# Altium PCB WoodStoveLayout1.PcbDoc (part 3 of 4)
Units mil, origin at the board's own origin, x right, y up, seen from the top; angles counter-clockwise.
Board outline 4000 x 3000 mil, 4 copper layers (Top Layer, L2, L3, Bottom Layer), stack 64.6 mil thick; 132 components, 92 nets, 551 pads, 53 vias.
Unrouted connection lines stored in the file: 224.
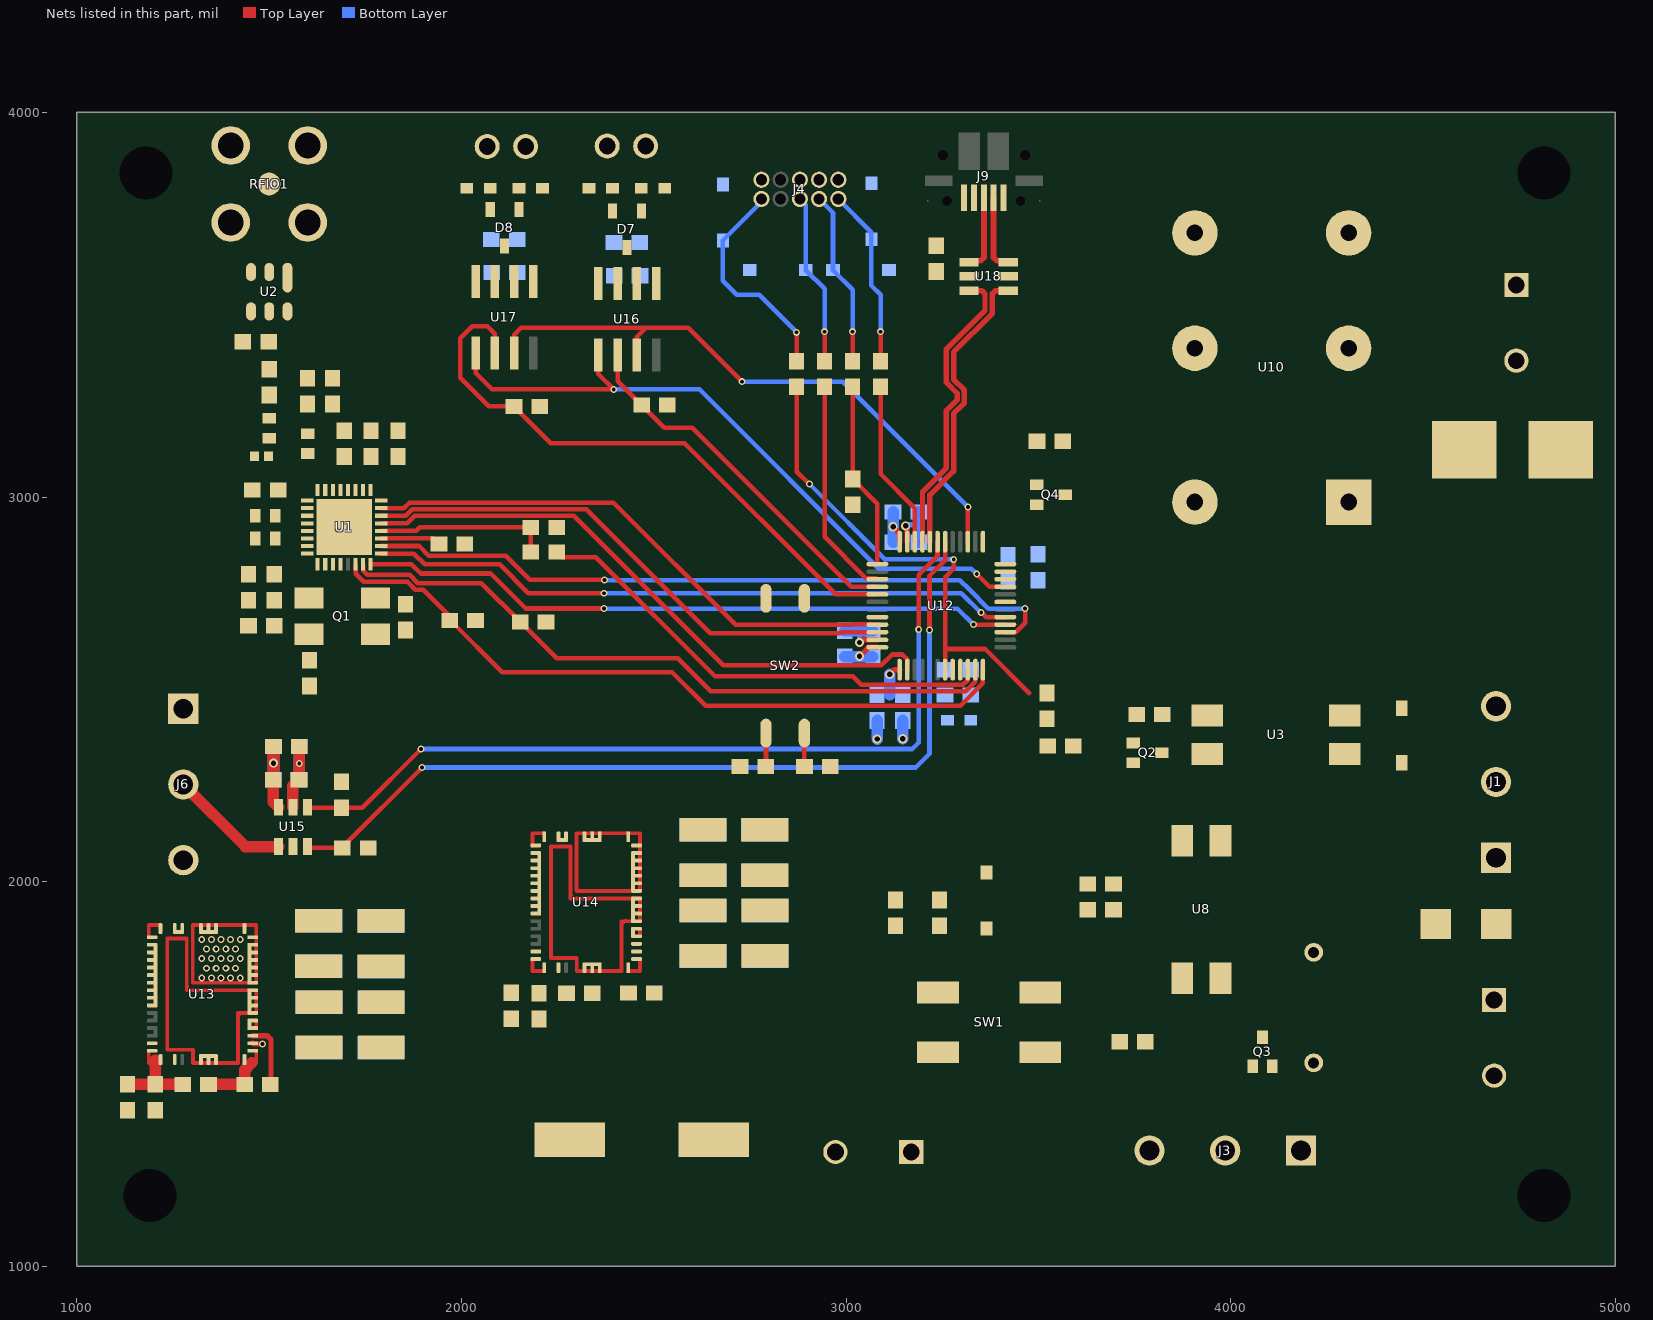
[diagram p4: the nets of this part, all layers, seen from the top]

## Part data (continued)
C25 C26 C35 C36: Capacitance=10uF, Case/Package=1210, Case Code (Metric)=3225, Dielectric=X7R, Manufacturer=Murata, Manufacturer Part Number=GRM32ER71H106KA12L, Max Operating Temperature=125°C, Min Operating Temperature=-55°C, Package Quantity=1000, Supplier Part Number 1=GRM32ER71H106KA12L-ND, Tolerance=10%, Voltage=50V, Case Code (Imperial)=1210, ComponentLink1Description=https://datasheet.ciiva.com/16497/product-16497010.pdf, ComponentLink1URL=https://datasheet.ciiva.com/16497/product-16497010.pdf, ComponentLink2Description=https://datasheet.ciiva.com/6270/partnumbering-e-01-6270167.pdf, ComponentLink2URL=https://datasheet.ciiva.com/6270/partnumbering-e-01-6270167.pdf, ComponentLink3Description=https://datasheet.ciiva.com/6270/partnumbering-e-01-6270168.pdf, ComponentLink3URL=https://datasheet.ciiva.com/6270/partnumbering-e-01-6270168.pdf, ComponentLink4Description=https://datasheet.ciiva.com/6270/partnumbering-e-01-6270169.pdf, ComponentLink4URL=https://datasheet.ciiva.com/6270/partnumbering-e-01-6270169.pdf, ComponentLink5Description=https://datasheet.ciiva.com/11789/0900766b80ef921d-11789081.pdf, ComponentLink5URL=https://datasheet.ciiva.com/11789/0900766b80ef921d-11789081.pdf, ComponentLink6Description=https://datasheet.ciiva.com/3777/4286grm32er71h106ka1223-3777306.pdf, ComponentLink6URL=https://datasheet.ciiva.com/3777/4286grm32er71h106ka1223-3777306.pdf, ComponentLink7Description=https://datasheet.ciiva.com/11607/c02e-11607596.pdf, ComponentLink7URL=https://datasheet.ciiva.com/11607/c02e-11607596.pdf, ComponentLink8Description=https://datasheet.ciiva.com/46441/1754714-46441340.pdf, ComponentLink8URL=https://datasheet.ciiva.com/46441/1754714-46441340.pdf, ComponentLink9Description=https://datasheet.ciiva.com/2989/c02e-2989823.pdf, ComponentLink9URL=https://datasheet.ciiva.com/2989/c02e-2989823.pdf, Depth=2.5mm, Height=2.5mm, Lead Free="Lead Free", Length=3.2mm, Material=Ceramic, Mount="Surface Mount", Packaging="Tape and Reel", Radiation Hardening=No, REACH SVHC="No SVHC", Stock 1=0, Supplier 1=Digi-Key, Termination=SMD/SMT, Thickness=0.106inch, Voltage Rating=50V, Voltage Rating (DC)=50V, Width=2.5mm
C27 C28 C37 C38: Capacitance=4.7uF, Case/Package=1210, Case Code (Metric)=3225, Dielectric=X7R, Manufacturer=Murata, Manufacturer Part Number=GRM32ER71H475KA88L, Max Operating Temperature=125°C, Min Operating Temperature=-55°C, Package Quantity=1, Tolerance=10%, Voltage=50V, Case Code (Imperial)=1210, ComponentLink1Description=https://datasheet.ciiva.com/7937/1747494-7937780.pdf, ComponentLink1URL=https://datasheet.ciiva.com/7937/1747494-7937780.pdf, ComponentLink2Description=https://datasheet.ciiva.com/11786/0900766b806042af-11786805.pdf, ComponentLink2URL=https://datasheet.ciiva.com/11786/0900766b806042af-11786805.pdf, ComponentLink3Description=https://datasheet.ciiva.com/22703/1747494-22703399.pdf, ComponentLink3URL=https://datasheet.ciiva.com/22703/1747494-22703399.pdf, ComponentLink4Description=https://datasheet.ciiva.com/48436/grm32er71h475ka88l-eng-tds-48436715.pdf, ComponentLink4URL=https://datasheet.ciiva.com/48436/grm32er71h475ka88l-eng-tds-48436715.pdf, ComponentLink5Description=https://datasheet.ciiva.com/18101/getdatasheetpartid-55823-18101548.pdf, ComponentLink5URL=https://datasheet.ciiva.com/18101/getdatasheetpartid-55823-18101548.pdf, ComponentLink6Description=https://datasheet.ciiva.com/142/partnumbering-e-01-142157.pdf, ComponentLink6URL=https://datasheet.ciiva.com/142/partnumbering-e-01-142157.pdf, ComponentLink7Description=https://datasheet.ciiva.com/142/partnumbering-e-01-142158.pdf, ComponentLink7URL=https://datasheet.ciiva.com/142/partnumbering-e-01-142158.pdf, ComponentLink8Description=https://datasheet.ciiva.com/142/partnumbering-e-01-142159.pdf, ComponentLink8URL=https://datasheet.ciiva.com/142/partnumbering-e-01-142159.pdf, ComponentLink9Description=https://datasheet.ciiva.com/16199/product-16199503.pdf, ComponentLink9URL=https://datasheet.ciiva.com/16199/product-16199503.pdf, Depth=2.5mm, Height=2.5mm, Lead Free="Lead Free", Length=3.2mm, Mount="Surface Mount", Number of Pins=2, Packaging="Tape and Reel", Radiation Hardening=No, REACH SVHC="No SVHC", Stock 1=0, Supplier 1="Future Electronics", Supplier Part Number 1=GRM32ER71H475KA88L, Termination=SMD/SMT, Thickness=0.106inch, Voltage Rating=50V, Voltage Rating (DC)=50V, Width=0.098inch
C29: Capacitance=100pF, Case/Package=0603, Case Code (Metric)=1608, Dielectric=C0G, Dielectric Material=Ceramic, Insulation Resistance=10GR, Manufacturer=Murata, Manufacturer Part Number=GRM1885C1H101JA01D, Max Operating Temperature=125°C, Min Operating Temperature=-55°C, Package Quantity=1, Supplier Part Number 1=490-1427-2-ND, Temperature Coefficient=30ppm/°C, Tolerance=5%, Voltage=50V, Case Code (Imperial)=0603, ComponentLink1Description=https://datasheet.ciiva.com/131/product-131088.pdf, ComponentLink1URL=https://datasheet.ciiva.com/131/product-131088.pdf, ComponentLink2Description=https://datasheet.ciiva.com/3777/grm1885c1h101ja0123-3777264.pdf, ComponentLink2URL=https://datasheet.ciiva.com/3777/grm1885c1h101ja0123-3777264.pdf, ComponentLink3Description=https://datasheet.ciiva.com/131/partnumbering-e-01-131089.pdf, ComponentLink3URL=https://datasheet.ciiva.com/131/partnumbering-e-01-131089.pdf, ComponentLink4Description=https://datasheet.ciiva.com/18100/getdatasheetpartid-26823-18100641.pdf, ComponentLink4URL=https://datasheet.ciiva.com/18100/getdatasheetpartid-26823-18100641.pdf, ComponentLink5Description=https://datasheet.ciiva.com/11605/c02e-11605557.pdf, ComponentLink5URL=https://datasheet.ciiva.com/11605/c02e-11605557.pdf, ComponentLink6Description=https://datasheet.ciiva.com/28556/4360-28556551.pdf, ComponentLink6URL=https://datasheet.ciiva.com/28556/4360-28556551.pdf, ComponentLink7Description=https://datasheet.ciiva.com/7828/4360-7828889.pdf, ComponentLink7URL=https://datasheet.ciiva.com/7828/4360-7828889.pdf, ComponentLink8Description=https://datasheet.ciiva.com/7828/4360-7828890.pdf, ComponentLink8URL=https://datasheet.ciiva.com/7828/4360-7828890.pdf, ComponentLink9Description=https://datasheet.ciiva.com/7828/4360-7828891.pdf, ComponentLink9URL=https://datasheet.ciiva.com/7828/4360-7828891.pdf, ComponentLink10Description=https://datasheet.ciiva.com/14116/grmseries-tc-hitype-eng-14116828.pdf, ComponentLink10URL=https://datasheet.ciiva.com/14116/grmseries-tc-hitype-eng-14116828.pdf, ComponentLink11Description=https://datasheet.ciiva.com/16291/product-16291613.pdf, ComponentLink11URL=https://datasheet.ciiva.com/16291/product-16291613.pdf, ComponentLink12Description=https://datasheet.ciiva.com/131/partnumbering-e-01-131087.pdf, ComponentLink12URL=https://datasheet.ciiva.com/131/partnumbering-e-01-131087.pdf, ComponentLink13Description=https://datasheet.ciiva.com/14116/grmseries-tc-hitype-eng-14116815.pdf, ComponentLink13URL=https://datasheet.ciiva.com/14116/grmseries-tc-hitype-eng-14116815.pdf, ComponentLink14Description=https://datasheet.ciiva.com/29149/450134-da-01-en-vs-kondensator-0603-29149008.pdf, ComponentLink14URL=https://datasheet.ciiva.com/29149/450134-da-01-en-vs-kondensator-0603-29149008.pdf, Depth=0.8mm, Height=0.8mm, Lead Free="Lead Free", Length=1.6mm, Material=Ceramic, Mount="Surface Mount", Number of Pins=2, Packaging="Tape and Reel", Pricing 1="4000=0.01524 (USD)", Radiation Hardening=No, REACH SVHC=Unknown, Stock 1=0, Supplier 1=Digi-Key, Termination=SMD/SMT, Thickness=0.035inch, Voltage Rating=50V, Voltage Rating (DC)=50V, Weight=7.1E-05oz, Width=0.031inch
C30 C31 C32 C33 C40 C41 C42: Capacitance=22uF, Case/Package=1210, Case Code (Metric)=3225, Dielectric=X7R, Manufacturer=Murata, Manufacturer Part Number=GRM32ER71E226KE15L, Max Operating Temperature=125°C, Min Operating Temperature=-55°C, Package Quantity=1, Supplier Part Number 1=490-5313-2-ND, Tolerance=10%, Voltage=25V, Case Code (Imperial)=1210, ComponentLink1Description=https://datasheet.ciiva.com/6072/1697714-6072768.pdf, ComponentLink1URL=https://datasheet.ciiva.com/6072/1697714-6072768.pdf, ComponentLink2Description=https://datasheet.ciiva.com/16497/product-16497009.pdf, ComponentLink2URL=https://datasheet.ciiva.com/16497/product-16497009.pdf, ComponentLink3Description=https://datasheet.ciiva.com/175/partnumbering-e-01-175746.pdf, ComponentLink3URL=https://datasheet.ciiva.com/175/partnumbering-e-01-175746.pdf, ComponentLink4Description=https://datasheet.ciiva.com/175/partnumbering-e-01-175747.pdf, ComponentLink4URL=https://datasheet.ciiva.com/175/partnumbering-e-01-175747.pdf, ComponentLink5Description=https://datasheet.ciiva.com/175/partnumbering-e-01-175748.pdf, ComponentLink5URL=https://datasheet.ciiva.com/175/partnumbering-e-01-175748.pdf, ComponentLink6Description=https://datasheet.ciiva.com/3776/2741grm32er71e226ke1523-3776996.pdf, ComponentLink6URL=https://datasheet.ciiva.com/3776/2741grm32er71e226ke1523-3776996.pdf, ComponentLink7Description=https://datasheet.ciiva.com/22703/1697714-22703397.pdf, ComponentLink7URL=https://datasheet.ciiva.com/22703/1697714-22703397.pdf, ComponentLink8Description=https://datasheet.ciiva.com/11789/0900766b80ef921d-11789129.pdf, ComponentLink8URL=https://datasheet.ciiva.com/11789/0900766b80ef921d-11789129.pdf, ComponentLink9Description=https://datasheet.ciiva.com/29201/451826-da-01-de-vs-kondens-grm32-er71e-226ke15l-29201795.pdf, ComponentLink9URL=https://datasheet.ciiva.com/29201/451826-da-01-de-vs-kondens-grm32-er71e-226ke15l-29201795.pdf, Depth=2.5mm, Height=2.5mm, Lead Free="Lead Free", Length=3.2mm, Material=Ceramic, Mount="Surface Mount", Number of Pins=2, Packaging="Tape and Reel", Pricing 1="1000=0.29 (USD)", Radiation Hardening=No, REACH SVHC="No SVHC", Stock 1=0, Supplier 1=Digi-Key, Termination=SMD/SMT, Thickness=0.106inch, Voltage Rating=25V, Voltage Rating (DC)=25V, Width=0.098inch
C34: Capacitance=100uF, Case/Package=Radial, ESR (Equivalent Series Resistance)=28mR, Leakage Current=50uA, Manufacturer=Panasonic, Manufacturer Part Number=EEH-ZA1H101P, Max Operating Temperature=105°C, Min Operating Temperature=-55°C, Package Quantity=500, Ripple Current=2A, Supplier Part Number 1=P15442TR-ND, Tolerance=20%, Voltage=50V, ComponentLink1Description=https://datasheet.ciiva.com/48541/eehza-eng-tds-48541031.pdf, ComponentLink1URL=https://datasheet.ciiva.com/48541/eehza-eng-tds-48541031.pdf, ComponentLink2Description=https://datasheet.ciiva.com/18524/aba0000ce136-18524922.pdf, ComponentLink2URL=https://datasheet.ciiva.com/18524/aba0000ce136-18524922.pdf, ComponentLink3Description=https://datasheet.ciiva.com/6134/1536543-6134363.pdf, ComponentLink3URL=https://datasheet.ciiva.com/6134/1536543-6134363.pdf, ComponentLink4Description=https://datasheet.ciiva.com/7794/1536543-7794235.pdf, ComponentLink4URL=https://datasheet.ciiva.com/7794/1536543-7794235.pdf, ComponentLink5Description=https://datasheet.ciiva.com/18524/aba0000ce136-18524923.pdf, ComponentLink5URL=https://datasheet.ciiva.com/18524/aba0000ce136-18524923.pdf, ComponentLink6Description=https://datasheet.ciiva.com/30178/86aba0000ce136-30178699.pdf, ComponentLink6URL=https://datasheet.ciiva.com/30178/86aba0000ce136-30178699.pdf, ComponentLink7Description=https://datasheet.ciiva.com/14595/70256916-14595260.pdf, ComponentLink7URL=https://datasheet.ciiva.com/14595/70256916-14595260.pdf, ComponentLink8Description=https://datasheet.ciiva.com/18524/aba0000ce136-18524924.pdf, ComponentLink8URL=https://datasheet.ciiva.com/18524/aba0000ce136-18524924.pdf, ComponentLink9Description=https://datasheet.ciiva.com/28691/1536543-28691421.pdf, ComponentLink9URL=https://datasheet.ciiva.com/28691/1536543-28691421.pdf, ComponentLink10Description=https://datasheet.ciiva.com/22730/1536543-22730558.pdf, ComponentLink10URL=https://datasheet.ciiva.com/22730/1536543-22730558.pdf, ComponentLink11Description=https://datasheet.ciiva.com/10327/aba0000ce136-10327231.pdf, ComponentLink11URL=https://datasheet.ciiva.com/10327/aba0000ce136-10327231.pdf, Diameter=10mm, Height=10.2mm, Height - Seated (Max)=0.413inch, Lead Diameter=0.9mm, Lead Free="Lead Free", Lead Pitch=4.6mm, Length=10.2mm, Life (Hours)=10000Hour, Material=Polymer, Mount="Surface Mount,PCB", Packaging="Tape and Reel", Polarity=Polar, Pricing 1="500=1.20086, 1000=1.05076, 2500=1.01323, 5000=0.9757 (USD)", Radiation Hardening=No, REACH SVHC="No SVHC", Ripple Current (AC)=2A, Stock 1=21500, Supplier 1=Digi-Key, Termination=SMD/SMT, Voltage Rating=50V, Voltage Rating (DC)=50V
C39: Capacitance=150pF, Case/Package=0603, Case Code (Metric)=1608, Dielectric=C0G, Dielectric Material=Ceramic, Insulation Resistance=10GR, Manufacturer=Murata, Manufacturer Part Number=GRM1885C1H151JA01D, Max Operating Temperature=125°C, Min Operating Temperature=-55°C, Package Quantity=1, Supplier Part Number 1=490-1431-2-ND, Temperature Coefficient=30ppm/°C, Tolerance=5%, Voltage=50V, Case Code (Imperial)=0603, ComponentLink1Description=https://datasheet.ciiva.com/18100/getdatasheetpartid-31970-18100850.pdf, ComponentLink1URL=https://datasheet.ciiva.com/18100/getdatasheetpartid-31970-18100850.pdf, ComponentLink2Description=https://datasheet.ciiva.com/7828/4360-7828901.pdf, ComponentLink2URL=https://datasheet.ciiva.com/7828/4360-7828901.pdf, ComponentLink3Description=https://datasheet.ciiva.com/7828/4360-7828902.pdf, ComponentLink3URL=https://datasheet.ciiva.com/7828/4360-7828902.pdf, ComponentLink4Description=https://datasheet.ciiva.com/131/partnumbering-e-01-131975.pdf, ComponentLink4URL=https://datasheet.ciiva.com/131/partnumbering-e-01-131975.pdf, ComponentLink5Description=https://datasheet.ciiva.com/131/partnumbering-e-01-131976.pdf, ComponentLink5URL=https://datasheet.ciiva.com/131/partnumbering-e-01-131976.pdf, ComponentLink6Description=https://datasheet.ciiva.com/131/partnumbering-e-01-131977.pdf, ComponentLink6URL=https://datasheet.ciiva.com/131/partnumbering-e-01-131977.pdf, ComponentLink7Description=https://datasheet.ciiva.com/16214/product-16214654.pdf, ComponentLink7URL=https://datasheet.ciiva.com/16214/product-16214654.pdf, ComponentLink8Description=https://datasheet.ciiva.com/11787/0900766b808736db-11787103.pdf, ComponentLink8URL=https://datasheet.ciiva.com/11787/0900766b808736db-11787103.pdf, ComponentLink9Description=https://datasheet.ciiva.com/29241/450401-da-01-en-vs-kondensator-0603-29241818.pdf, ComponentLink9URL=https://datasheet.ciiva.com/29241/450401-da-01-en-vs-kondensator-0603-29241818.pdf, Depth=0.8mm, Height=0.8mm, Lead Free="Lead Free", Length=1.6mm, Material=Ceramic, Mount="Surface Mount", Number of Pins=2, Packaging="Tape and Reel", Pricing 1="4000=0.01668 (USD)", Radiation Hardening=No, REACH SVHC="No SVHC", Stock 1=0, Supplier 1=Digi-Key, Termination=SMD/SMT, Thickness=0.035inch, Voltage Rating=50V, Voltage Rating (DC)=50V, Width=0.8mm
C43: Capacitance=47uF, Case/Package=1210, Case Code (Metric)=3225, Dielectric=X5R, Manufacturer=Murata, Manufacturer Part Number=GRM32ER61C476KE15L, Max Operating Temperature=85°C, Min Operating Temperature=-55°C, Package Quantity=1, Supplier Part Number 1=GRM32ER61C476KE15L-ND, Tolerance=10%, Voltage=16V, Case Code (Imperial)=1210, ComponentLink1Description=https://datasheet.ciiva.com/5411/product-5411296.pdf, ComponentLink1URL=https://datasheet.ciiva.com/5411/product-5411296.pdf, ComponentLink2Description=https://datasheet.ciiva.com/6264/c02e-6264496.pdf, ComponentLink2URL=https://datasheet.ciiva.com/6264/c02e-6264496.pdf, ComponentLink3Description=https://datasheet.ciiva.com/16497/product-16497029.pdf, ComponentLink3URL=https://datasheet.ciiva.com/16497/product-16497029.pdf, ComponentLink4Description=https://datasheet.ciiva.com/16625/product-16625285.pdf, ComponentLink4URL=https://datasheet.ciiva.com/16625/product-16625285.pdf, ComponentLink5Description=https://datasheet.ciiva.com/6173/1747491-6173112.pdf, ComponentLink5URL=https://datasheet.ciiva.com/6173/1747491-6173112.pdf, ComponentLink6Description=https://datasheet.ciiva.com/6264/partnumbering-e-01-6264495.pdf, ComponentLink6URL=https://datasheet.ciiva.com/6264/partnumbering-e-01-6264495.pdf, ComponentLink7Description=https://datasheet.ciiva.com/29202/451184-da-01-de-vs-chip-kond-1210-47-0-uf-10pr-16-0v-x5r-29202483.pdf, ComponentLink7URL=https://datasheet.ciiva.com/29202/451184-da-01-de-vs-chip-kond-1210-47-0-uf-10pr-16-0v-x5r-29202483.pdf, ComponentLink8Description=https://datasheet.ciiva.com/29201/451871-da-01-de-vs-kondens-grm32-er61c-476ke15l-29201820.pdf, ComponentLink8URL=https://datasheet.ciiva.com/29201/451871-da-01-de-vs-kondens-grm32-er61c-476ke15l-29201820.pdf, Depth=2.5mm, Height=2.5mm, Lead Free="Lead Free", Length=3.2mm, Material=Ceramic, Mount="Surface Mount", Number of Pins=2, Packaging="Cut Tape", Radiation Hardening=No, REACH SVHC="No SVHC", Stock 1=0, Supplier 1=Digi-Key, Termination=SMD/SMT, Thickness=0.106inch, Voltage Rating=16V, Voltage Rating (DC)=16V, Width=0.098inch
D1: "LED; SMD; 0603; red; 18-54mcd; 1.6x0.8x0.55mm; 130°; 2÷2.4V; 20mA", Package="0603 Lite-On", Availability=Good, MF=Lite-On, MP=LTST-C191KRKT, Price="0.06 USD", SnapEDA_Link=https://www.snapeda.com/parts/LTST-C191KRKT/Lite-On/view-part/?ref=snap
D2 D3 D4 D5 D6: "DIODE Zener 5.1V 500mw", Breakdown Voltage=5.36V, Case/Package=SOD-123-2, Forward Voltage=900mV, Manufacturer="ON Semiconductor", Max Operating Temperature=150°C, Max Power Dissipation=500mW, Max Reverse Leakage Current=2uA, Min Operating Temperature=-55°C, Package Quantity=1, Test Current=5mA, Tolerance=5%, Voltage Rating (DC)=5.1V, Zener Current=10mA, ComponentLink1Description=https://datasheet.ciiva.com/895/mmsz2v4t1-d-895025.pdf, ComponentLink1URL=https://datasheet.ciiva.com/895/mmsz2v4t1-d-895025.pdf, ComponentLink2Description=https://datasheet.ciiva.com/895/mmsz2v4t1-d-895026.pdf, ComponentLink2URL=https://datasheet.ciiva.com/895/mmsz2v4t1-d-895026.pdf, ComponentLink3Description=https://datasheet.ciiva.com/895/mmsz2v4t1-d-895027.pdf, ComponentLink3URL=https://datasheet.ciiva.com/895/mmsz2v4t1-d-895027.pdf, ComponentLink4Description=https://datasheet.ciiva.com/15142/getdatasheetpartid-72078-15142387.pdf, ComponentLink4URL=https://datasheet.ciiva.com/15142/getdatasheetpartid-72078-15142387.pdf, ComponentLink5Description=https://datasheet.ciiva.com/8346/mmsz2v4t1-d-8346086.pdf, ComponentLink5URL=https://datasheet.ciiva.com/8346/mmsz2v4t1-d-8346086.pdf, ComponentLink6Description=https://datasheet.ciiva.com/8026/78656-8026888.pdf, ComponentLink6URL=https://datasheet.ciiva.com/8026/78656-8026888.pdf, ComponentLink7Description=https://datasheet.ciiva.com/26092/mmsz2v4t1-d-26092696.pdf, ComponentLink7URL=https://datasheet.ciiva.com/26092/mmsz2v4t1-d-26092696.pdf, ComponentLink8Description=https://datasheet.ciiva.com/16542/mmsz2v4t1-d-16542073.pdf, ComponentLink8URL=https://datasheet.ciiva.com/16542/mmsz2v4t1-d-16542073.pdf, ComponentLink9Description=https://datasheet.ciiva.com/8026/78656-8026890.pdf, ComponentLink9URL=https://datasheet.ciiva.com/8026/78656-8026890.pdf, Element Configuration=Single, Height=1.12mm, Impedance=60R, Lead Free="Lead Free", Length=2.69mm, Manufacturer Part Number=MMSZ5V1T1G, Material=Plastic, Number of Pins=2, Packaging="Tape and Reel", Peak Reverse Current=2uA, Power Dissipation=500mW, Power Rating=500mW, Radiation Hardening=No, REACH SVHC="No SVHC", Stock 1=0, Supplier 1="Future Electronics", Supplier Part Number 1=MMSZ5V1T1G, Voltage Tolerance=5%, Width=1.6mm, Working Voltage=5.1V, Zener Voltage=5.1V
D?: "Schottky Power Rectifier, 2-Pin SMA, Pb-Free, Tape and Reel", Manufacturer="On Semiconductor", Supplier Part Number 1=SS16T3GOSTR-ND, ComponentLink1Description="Manufacturer URL", ComponentLink1URL=http://www.onsemi.com/, ComponentLink2Description=Datasheet, ComponentLink2URL=http://www.onsemi.cn/pub_link/Collateral/SS16-D.PDF, ComponentLink3Description="Package Specification", ComponentLink3URL=http://www.onsemi.com/pub_link/Collateral/403D-02.PDF, Configuration=Single, DatasheetVersion="Rev. 7", IFSM Max (A)=40, Mounting Technology="Surface Mount", PackageDescription="2-Pin Small Molded Package, J-Bend Lead, Body 2.605 x 4.315 mm", PackageReference=SMA-2-403D-02, PackageVersion="Rev. G, 07/2012", Packing="Tape and Reel", PartNumber=SS16T3G, RoHS=TRUE, Supplier 1=Digi-Key, Supplier 2=Digi-Key, Supplier 3=Digi-Key, Supplier 4=Farnell, Supplier 5=Farnell, Supplier 6=Newark, Supplier 7=Newark, Supplier 8=Mouser, Supplier Part Number 2=SS16T3GOSCT-ND, Supplier Part Number 3=SS16T3GOSDKR-ND, Supplier Part Number 4=2317421, Supplier Part Number 5=1900107, Supplier Part Number 6=98H0976, Supplier Part Number 7=10N9613, Supplier Part Number 8=863-SS16T3G
FB1: Case/Package=0603, Case Code (Metric)=1608, Current Rating=500mA, DC Resistance (DCR)=380mR, Frequency=100MHz, Manufacturer=Murata, Manufacturer Part Number=BLM18AG601SN1D, Max Operating Temperature=125°C, Min Operating Temperature=-55°C, Package Quantity=1, Supplier Part Number 1=490-1014-2-ND, Tolerance=25%, Case Code (Imperial)=0603, ComponentLink1Description=https://datasheet.ciiva.com/1012/l0110s0100blm18a-1012017.pdf, ComponentLink1URL=https://datasheet.ciiva.com/1012/l0110s0100blm18a-1012017.pdf, ComponentLink2Description=https://datasheet.ciiva.com/1012/l0110s0100blm18a-1012018.pdf, ComponentLink2URL=https://datasheet.ciiva.com/1012/l0110s0100blm18a-1012018.pdf, ComponentLink3Description=https://datasheet.ciiva.com/1012/l0110s0100blm18a-1012019.pdf, ComponentLink3URL=https://datasheet.ciiva.com/1012/l0110s0100blm18a-1012019.pdf, ComponentLink4Description=https://datasheet.ciiva.com/1466/1756147-1466933.pdf, ComponentLink4URL=https://datasheet.ciiva.com/1466/1756147-1466933.pdf, ComponentLink5Description=https://datasheet.ciiva.com/19460/1844766-19460213.pdf, ComponentLink5URL=https://datasheet.ciiva.com/19460/1844766-19460213.pdf, ComponentLink6Description=https://datasheet.ciiva.com/1466/1756147-1466934.pdf, ComponentLink6URL=https://datasheet.ciiva.com/1466/1756147-1466934.pdf, ComponentLink7Description=https://datasheet.ciiva.com/16210/l0110s0100blm18a-16210006.pdf, ComponentLink7URL=https://datasheet.ciiva.com/16210/l0110s0100blm18a-16210006.pdf, ComponentLink8Description=https://datasheet.ciiva.com/3081/l0110s0100blm18a-3081613.pdf, ComponentLink8URL=https://datasheet.ciiva.com/3081/l0110s0100blm18a-3081613.pdf, ComponentLink9Description=https://datasheet.ciiva.com/29347/442309-da-01-en-chip-drossel-0603-600r-500ma-1-6x0-8mm-29347900.pdf, ComponentLink9URL=https://datasheet.ciiva.com/29347/442309-da-01-en-chip-drossel-0603-600r-500ma-1-6x0-8mm-29347900.pdf, ComponentLink10Description=https://datasheet.ciiva.com/41449/001172228-da-01-en-drossel-0603-600r-1-6x0-8mm-4000st-41449517.pdf, ComponentLink10URL=https://datasheet.ciiva.com/41449/001172228-da-01-en-drossel-0603-600r-1-6x0-8mm-4000st-41449517.pdf, Core Material=Ferrite, DC Current=500mA, Depth=0.8mm, Height=0.8mm, Impedance=600R, Lead Free="Lead Free", Length=1.6mm, Material=Steel,Ferrite, Max Current Rating=500mA, Max DC Current=500mA, Military Standard=Not, Number of Circuits=1, Number of Lines=1, Number of Pins=2, Packaging="Tape and Reel", Pricing 1="4000=0.02096, 8000=0.019, 12000=0.01834, 28000=0.01703, 100000=0.01683 (USD)", Radiation Hardening=No, REACH SVHC="No SVHC", Shielding=Unshielded, Stock 1=432000, Supplier 1=Digi-Key, Termination=SMD/SMT, Test Frequency=100MHz, Weight=7.1E-05oz, Width=0.8mm
FB2 FB3 FB4 FB5: Case/Package=0603, Case Code (Metric)=1608, Current Rating=1A, DC Resistance (DCR)=200mR, Manufacturer=Murata, Manufacturer Part Number=BLM18PG471SN1D, Max Operating Temperature=125°C, Min Operating Temperature=-55°C, Package Quantity=1, Supplier Part Number 1=490-5223-2-ND, Test Frequency=100MHz, Tolerance=25%, Case Code (Imperial)=0603, ComponentLink1Description=https://datasheet.ciiva.com/11800/0900766b81275ca5-11800885.pdf, ComponentLink1URL=https://datasheet.ciiva.com/11800/0900766b81275ca5-11800885.pdf, ComponentLink2Description=https://datasheet.ciiva.com/16331/l0110s0100blm18p-16331542.pdf, ComponentLink2URL=https://datasheet.ciiva.com/16331/l0110s0100blm18p-16331542.pdf, ComponentLink3Description=https://datasheet.ciiva.com/8021/1740433-8021497.pdf, ComponentLink3URL=https://datasheet.ciiva.com/8021/1740433-8021497.pdf, ComponentLink4Description=https://datasheet.ciiva.com/6212/l0110s0100blm18p-6212506.pdf, ComponentLink4URL=https://datasheet.ciiva.com/6212/l0110s0100blm18p-6212506.pdf, ComponentLink5Description=https://datasheet.ciiva.com/8021/1740433-8021498.pdf, ComponentLink5URL=https://datasheet.ciiva.com/8021/1740433-8021498.pdf, ComponentLink6Description=https://datasheet.ciiva.com/6212/l0110s0100blm18p-6212508.pdf, ComponentLink6URL=https://datasheet.ciiva.com/6212/l0110s0100blm18p-6212508.pdf, ComponentLink7Description=https://datasheet.ciiva.com/14122/blm-series-eng-tds-14122876.pdf, ComponentLink7URL=https://datasheet.ciiva.com/14122/blm-series-eng-tds-14122876.pdf, ComponentLink8Description=https://datasheet.ciiva.com/6212/l0110s0100blm18p-6212509.pdf, ComponentLink8URL=https://datasheet.ciiva.com/6212/l0110s0100blm18p-6212509.pdf, ComponentLink9Description=https://datasheet.ciiva.com/8508/l0110s0100blm18p-8508303.pdf, ComponentLink9URL=https://datasheet.ciiva.com/8508/l0110s0100blm18p-8508303.pdf, Core Material=Ferrite, DC Current=1A, Depth=0.8mm, Height=0.8mm, Impedance=470R, Lead Free="Lead Free", Length=1.6mm, Material=Steel,Ferrite, Max Current Rating=1A, Max DC Current=1A, Military Standard=Not, Number of Circuits=1, Number of Lines=1, Number of Pins=2, Packaging="Tape and Reel", Pricing 1="4000=0.02208, 8000=0.02001, 12000=0.01932, 28000=0.01794, 100000=0.01773 (USD)", Radiation Hardening=No, REACH SVHC="No SVHC", Resistance=200mR, Stock 1=328000, Supplier 1=Digi-Key, Termination=SMD/SMT, Width=0.8mm
J1 J3 J6: "3 Position terminal block"
J2 J5 J10: "Female Header, Pitch 5 mm, 1 x 2 Position, Height 10 mm, Tail Length 3.5 mm, Rohs, Bulk", Color=Green, Current=13.5A, Standard Package=300, Supplier Part Number 1=23C9697, Voltage=300V, 3D Model=282836-2.pdf, Category="Connectors, Interconnects", Clamp Material - Plating="Brass - Nickel Plated", ComponentLink1Description="Manufacturer URL", ComponentLink1URL=http://www.te.com, ComponentLink2Description=Datasheet, ComponentLink2URL=http://www.te.com.cn/commerce/DocumentDelivery/DDEController?Action=showdoc&DocId=Catalog+Section%7F1308389_EUROSTYLE_TERMINAL_BLOCKS%7F0607%7Fpdf%7FEnglish%7FENG_CS_1308389_EUROSTYLE_TERMINAL_BLOCKS_0607.pdf%7F282836-2, Contact Material - Plating="Brass - Tin Plated", Dynamic Catalog="Buchanan Series", Family="Terminal Blocks - Wire to Board", Featured Product="Eurostyle Terminal Block Connectors", Features="Interlocking (Side)", Housing Material="Polyamide (PA66), Nylon 6/6", Mating Orientation="Horizontal with Board", Mounting Type="Through Hole", Number of Levels=1, Other Names="5ULV-02B / A98076", PackageDescription="Female Header, Pitch 5 mm, 1 x 2 Position, Height 10 mm, Tail Length 3.5 mm", PackageReference=THD, Packaging=Bulk, Pitch="0.197\" (5.00mm)", Positions Per Level=2, Product Training Modules="Wire-to-Board Eurostyle Terminal Blocks", RoHS Information="282836-2 Statement of Compliance", Screw Material - Plating="Brass - Nickel Plated", Screw Thread=M3, Series=Buchanan, Supplier 1=Newark, Supplier 2=Farnell, Supplier 3=Digi-Key, Supplier Part Number 2=3089034, Supplier Part Number 3=A98076-ND, Torque - Screw="0.68 Nm (6 Lb-In)", Wire Gauge="16-30 AWG", Wire Termination="Screw - Rising Cage Clamp"
J4: Housing Colour=Black, Manufacturer=Samtec, Manufacturer Part Number=SHF-105-01-L-D-TH, Max Operating Temperature=125°C, Min Operating Temperature=-55°C, Supplier Part Number 1=SHF-105-01-L-D-TH-ND, ComponentLink1Description=https://datasheet.ciiva.com/9475/eshf-9475367.pdf, ComponentLink1URL=https://datasheet.ciiva.com/9475/eshf-9475367.pdf, ComponentLink2Description=https://datasheet.ciiva.com/22665/shf-22665879.pdf, ComponentLink2URL=https://datasheet.ciiva.com/22665/shf-22665879.pdf, ComponentLink3Description=https://datasheet.ciiva.com/6091/shf-6091993.pdf, ComponentLink3URL=https://datasheet.ciiva.com/6091/shf-6091993.pdf, ComponentLink4Description=https://datasheet.ciiva.com/16710/eshf-16710363.pdf, ComponentLink4URL=https://datasheet.ciiva.com/16710/eshf-16710363.pdf, ComponentLink5Description=https://datasheet.ciiva.com/23730/shf-1xx-01-x-d-xx-xx-mkt-23730878.pdf, ComponentLink5URL=https://datasheet.ciiva.com/23730/shf-1xx-01-x-d-xx-xx-mkt-23730878.pdf, Contact Material=Bronze, Contact Plating=Nickel,Gold, Depth=5.59mm, Gender=Male, Housing Material=Polymer, Length=12.7mm, Number of Contacts=10, Number of Rows=2, Orientation=Straight, Packaging=Bulk, Pitch=1.27mm, Radiation Hardening=No, REACH SVHC="No SVHC", Stock 1=0, Supplier 1=Digi-Key, Termination=Solder
J7 J8: "2.54mm Terminal Connector"
J9: library part 10103594-0001LF
L1: Case/Package=0402, Case Code (Metric)=1005, Current Rating=120mA, DC Resistance (DCR)=2.52R, Inductance=100nh, Inductance Tolerance=5%, Manufacturer=Murata, Manufacturer Part Number=LQW15ANR10J00D, Max Operating Temperature=125°C, Min Operating Temperature=-55°C, Package Quantity=10000, Self Resonant Frequency=1.5GHz, Supplier Part Number 1=490-4090-2-ND, Test Frequency=100MHz, Case Code (Imperial)=0402, ComponentLink1Description=https://datasheet.ciiva.com/18088/getdatasheetpartid-55782-18088805.pdf, ComponentLink1URL=https://datasheet.ciiva.com/18088/getdatasheetpartid-55782-18088805.pdf, ComponentLink2Description=https://datasheet.ciiva.com/17247/l0075s0080lqw15a-00-17247734.pdf, ComponentLink2URL=https://datasheet.ciiva.com/17247/l0075s0080lqw15a-00-17247734.pdf, ComponentLink3Description=https://datasheet.ciiva.com/16293/l0075s0080lqw15a-00-16293049.pdf, ComponentLink3URL=https://datasheet.ciiva.com/16293/l0075s0080lqw15a-00-16293049.pdf, ComponentLink4Description=https://datasheet.ciiva.com/4977/product-4977354.pdf, ComponentLink4URL=https://datasheet.ciiva.com/4977/product-4977354.pdf, ComponentLink5Description=https://datasheet.ciiva.com/1042/l0075s0080lqw15a-00-1042204.pdf, ComponentLink5URL=https://datasheet.ciiva.com/1042/l0075s0080lqw15a-00-1042204.pdf, ComponentLink6Description=https://datasheet.ciiva.com/1042/l0075s0080lqw15a-00-1042205.pdf, ComponentLink6URL=https://datasheet.ciiva.com/1042/l0075s0080lqw15a-00-1042205.pdf, ComponentLink7Description=https://datasheet.ciiva.com/8507/l0075s0080lqw15a-00-8507421.pdf, ComponentLink7URL=https://datasheet.ciiva.com/8507/l0075s0080lqw15a-00-8507421.pdf, ComponentLink8Description=https://datasheet.ciiva.com/1042/l0075s0080lqw15a-00-1042206.pdf, ComponentLink8URL=https://datasheet.ciiva.com/1042/l0075s0080lqw15a-00-1042206.pdf, ComponentLink9Description=https://datasheet.ciiva.com/11799/0900766b8090d800-11799038.pdf, ComponentLink9URL=https://datasheet.ciiva.com/11799/0900766b8090d800-11799038.pdf, Core Material=Ferrite,Air, DC Current=120mA, Depth=0.6mm, Height=0.5mm, Lead Free="Lead Free", Length=1mm, Max DC Current=120mA, Military Standard=Not, Mount="Surface Mount", Number of Pins=2, Packaging="Tape and Reel", Pricing 1="10000=0.048, 30000=0.0465, 50000=0.045, 100000=0.0435 (USD)", Radiation Hardening=No, REACH SVHC="No SVHC", Shielding=Unshielded, Stock 1=160000, Supplier 1=Digi-Key, Termination=SMD/SMT, Tolerance=5%, Weight=2.8E-05oz, Width=0.5mm
L2: Case/Package=0402, Case Code (Metric)=1005, Current Rating=300mA, DC Resistance (DCR)=240mR, Inductance=8.2nh, Manufacturer=Murata, Manufacturer Part Number=LQG15HS8N2J02D, Max Operating Temperature=125°C, Min Operating Temperature=-55°C, Package Quantity=10000, Self Resonant Frequency=3.7GHz, Test Frequency=100MHz, Tolerance=5%, Case Code (Imperial)=0402, ComponentLink1Description=https://datasheet.ciiva.com/1038/l0075s0083lqg15hs-1038112.pdf, ComponentLink1URL=https://datasheet.ciiva.com/1038/l0075s0083lqg15hs-1038112.pdf, ComponentLink2Description=https://datasheet.ciiva.com/1038/l0075s0083lqg15hs-1038113.pdf, ComponentLink2URL=https://datasheet.ciiva.com/1038/l0075s0083lqg15hs-1038113.pdf, ComponentLink3Description=https://datasheet.ciiva.com/1038/l0075s0083lqg15hs-1038114.pdf, ComponentLink3URL=https://datasheet.ciiva.com/1038/l0075s0083lqg15hs-1038114.pdf, ComponentLink4Description=https://datasheet.ciiva.com/16208/l0075s0083lqg15hs-16208342.pdf, ComponentLink4URL=https://datasheet.ciiva.com/16208/l0075s0083lqg15hs-16208342.pdf, ComponentLink5Description=https://datasheet.ciiva.com/11799/0900766b8090d685-11799047.pdf, ComponentLink5URL=https://datasheet.ciiva.com/11799/0900766b8090d685-11799047.pdf, ComponentLink6Description=https://datasheet.ciiva.com/17247/l0075s0083lqg15hs-17247128.pdf, ComponentLink6URL=https://datasheet.ciiva.com/17247/l0075s0083lqg15hs-17247128.pdf, ComponentLink7Description=https://datasheet.ciiva.com/8510/l0075s0083lqg15hs-8510877.pdf, ComponentLink7URL=https://datasheet.ciiva.com/8510/l0075s0083lqg15hs-8510877.pdf, Core Material=Air, DC Current=300mA, Depth=0.55mm, Height=0.5mm, Height - Seated (Max)=0.022inch, Lead Free="Lead Free", Length=1mm, Max DC Current=300mA, Military Standard=Not, Mount="Surface Mount", Packaging="Tape and Reel", Pricing 1="2000=0.0218 (USD)", Q Factor=8, Radiation Hardening=No, Shielding=Unshielded, Stock 1=0, Supplier 1="Future Electronics", Supplier Part Number 1=LQG15HS8N2J02D, Termination=SMD/SMT, Weight=2.3E-05oz, Width=0.02inch
L3 L4: Case/Package=0402, Case Code (Metric)=1005, Current Rating=540mA, DC Resistance (DCR)=140mR, Inductance=8.2nh, Inductance Tolerance=2%, Manufacturer=Murata, Manufacturer Part Number=LQW15AN8N2G00D, Max Operating Temperature=125°C, Min Operating Temperature=-55°C, Package Quantity=10000, Self Resonant Frequency=5.5GHz, Supplier Part Number 1=490-6849-2-ND, Test Frequency=100MHz, Case Code (Imperial)=0402, ComponentLink1Description=https://datasheet.ciiva.com/17278/l0075s0080lqw15a-00-17278341.pdf, ComponentLink1URL=https://datasheet.ciiva.com/17278/l0075s0080lqw15a-00-17278341.pdf, ComponentLink2Description=https://datasheet.ciiva.com/11799/0900766b8090d800-11799384.pdf, ComponentLink2URL=https://datasheet.ciiva.com/11799/0900766b8090d800-11799384.pdf, ComponentLink3Description=https://datasheet.ciiva.com/16455/l0075s0080lqw15a-00-16455832.pdf, ComponentLink3URL=https://datasheet.ciiva.com/16455/l0075s0080lqw15a-00-16455832.pdf, Core Material=Ferrite,Air, DC Current=540mA, Depth=0.7mm, Height=0.5mm, Lead Free="Lead Free", Length=1mm, Max DC Current=540mA, Military Standard=Not, Mount="Surface Mount", Number of Pins=2, Packaging="Tape and Reel", Pricing 1="10000=0.0528, 30000=0.05115, 50000=0.0495, 100000=0.04785 (USD)", Q Factor=25, Radiation Hardening=No, REACH SVHC="No SVHC", Shielding=Unshielded, Stock 1=60000, Supplier 1=Digi-Key, Termination=SMD/SMT, Tolerance=2%, Weight=2.8E-05oz, Width=0.02inch
Q1: "CRYSTAL 12.8000MHZ 10PF SMD", Part No=ABM3B-12.800MHZ-10-1-U-T
Q2 Q3 Q4: "Small Signal MOSFET, 30 V, 270 mA, N-Channel, 3-Pin SC70, Pb-Free, Tape and Reel", Manufacturer="On Semiconductor", Package Type=SC-70-3, Supplier Part Number 1=60W1862, Channel Polarity="N Channel", Ciss Typ (pF)=20, ComponentLink1Description="Manufacturer URL", ComponentLink1URL=http://www.onsemi.com/, ComponentLink2Description=Datasheet, ComponentLink2URL=http://www.onsemi.cn/pub_link/Collateral/NTS4001N-D.PDF, ComponentLink3Description="Package Specification", ComponentLink3URL=http://www.onsemi.cn/pub_link/Collateral/419-04.PDF, Configuration=Single, Coss Typ (pF)=19, Crss Typ (pF)=7.25, DatasheetVersion="Rev. 5", ID Max (A)=0.27, Mounting Technology="Surface Mount", PackageDescription="3-Pin Small Outline Transistor, Body 2 x 1.25 mm, Pitch 0.65 mm", PackageReference=SC-70-3-419-04, PackageVersion="Rev. N, 11/2008", Packing="Tape and Reel", PartNumber=NVS4001NT1G, PD Max (W)=0.33, RoHS=Pb-Free, Supplier 1=Newark, Supplier 2=Mouser, Supplier Part Number 2=863-NVS4001NT1G, V(BR)DSS Min (V)=30, VGS(th) Max (V)=1.5, VGS Max (V)=20
R1: Case/Package=0603, Case Code (Metric)=1608, Manufacturer=Vishay, Manufacturer Part Number=CRCW0603100KFKEA, Max Operating Temperature=155°C, Max Power Dissipation=100mW, Min Operating Temperature=-55°C, Package Quantity=10, Resistance=100k, Temperature Coefficient=100ppm/°C, Tolerance=1%, Voltage Rating=75V, Case Code (Imperial)=0603, ComponentLink1Description=https://datasheet.ciiva.com/2465/dcrcwe3-2465525.pdf, ComponentLink1URL=https://datasheet.ciiva.com/2465/dcrcwe3-2465525.pdf, ComponentLink2Description=https://datasheet.ciiva.com/7777/1697337-7777269.pdf, ComponentLink2URL=https://datasheet.ciiva.com/7777/1697337-7777269.pdf, ComponentLink3Description=https://datasheet.ciiva.com/15159/getdatasheetpartid-93113-15159925.pdf, ComponentLink3URL=https://datasheet.ciiva.com/15159/getdatasheetpartid-93113-15159925.pdf, ComponentLink4Description=https://datasheet.ciiva.com/46441/1720486-46441605.pdf, ComponentLink4URL=https://datasheet.ciiva.com/46441/1720486-46441605.pdf, ComponentLink5Description=https://datasheet.ciiva.com/2465/dcrcwe3-2465526.pdf, ComponentLink5URL=https://datasheet.ciiva.com/2465/dcrcwe3-2465526.pdf, ComponentLink6Description=https://datasheet.ciiva.com/2465/dcrcwe3-2465527.pdf, ComponentLink6URL=https://datasheet.ciiva.com/2465/dcrcwe3-2465527.pdf, ComponentLink7Description=https://datasheet.ciiva.com/8340/dcrcwe3-8340199.pdf, ComponentLink7URL=https://datasheet.ciiva.com/8340/dcrcwe3-8340199.pdf, ComponentLink8Description=https://datasheet.ciiva.com/16725/70201119-16725223.pdf, ComponentLink8URL=https://datasheet.ciiva.com/16725/70201119-16725223.pdf, ComponentLink9Description=https://datasheet.ciiva.com/8340/dcrcwe3-8340201.pdf, ComponentLink9URL=https://datasheet.ciiva.com/8340/dcrcwe3-8340201.pdf, ComponentLink10Description=https://datasheet.ciiva.com/7791/66915-7791994.pdf, ComponentLink10URL=https://datasheet.ciiva.com/7791/66915-7791994.pdf, ComponentLink11Description=https://datasheet.ciiva.com/5545/dcrcwe3-109170-5545100.pdf, ComponentLink11URL=https://datasheet.ciiva.com/5545/dcrcwe3-109170-5545100.pdf, ComponentLink12Description=https://datasheet.ciiva.com/11809/0900766b80d98afc-11809004.pdf, ComponentLink12URL=https://datasheet.ciiva.com/11809/0900766b80d98afc-11809004.pdf, ComponentLink13Description=https://datasheet.ciiva.com/26317/fld-crcw-e3-data-en-26317165.pdf, ComponentLink13URL=https://datasheet.ciiva.com/26317/fld-crcw-e3-data-en-26317165.pdf, ComponentLink14Description=https://datasheet.ciiva.com/16941/dcrcw-16941311.pdf, ComponentLink14URL=https://datasheet.ciiva.com/16941/dcrcw-16941311.pdf, Composition="Thick Film", Contact Plating=Tin,Lead, Depth=0.85mm, Height=0.45mm, Lead Free="Lead Free", Length=1.55mm, Military Standard=Not, Number of Pins=2, Number of Terminations=2, Packaging="Tape and Reel", Power Rating=100mW, Radiation Hardening=No, REACH SVHC=Unknown, Stock 1=0, Supplier 1="Future Electronics", Supplier Part Number 1=CRCW0603100KFKEA, Termination=SMD/SMT, Voltage Rating (DC)=75V, Weight=7.1E-05oz, Width=0.033inch
R2 R3 R10 R23: Resistance=NC
R4 R5 R17 R27 R28 R31 R34 R35 R36 R37 R38: Case/Package=0603, Case Code (Metric)=1608, Manufacturer=Panasonic, Manufacturer Part Number=ERJ-3EKF1002V, Max Operating Temperature=155°C, Max Power Dissipation=100mW, Min Operating Temperature=-55°C, Package Quantity=1, Resistance=10k, Supplier Part Number 1=P10.0KHTR-ND, Temperature Coefficient=100ppm/°C, Tolerance=1%, Voltage Rating=75V, Case Code (Imperial)=0603, ComponentLink1Description=https://datasheet.ciiva.com/16511/aoa0000ce2-16511861.pdf, ComponentLink1URL=https://datasheet.ciiva.com/16511/aoa0000ce2-16511861.pdf, ComponentLink2Description=https://datasheet.ciiva.com/46372/1678782-46372725.pdf, ComponentLink2URL=https://datasheet.ciiva.com/46372/1678782-46372725.pdf, ComponentLink3Description=https://datasheet.ciiva.com/28514/426256-28514198.pdf, ComponentLink3URL=https://datasheet.ciiva.com/28514/426256-28514198.pdf, ComponentLink4Description=https://datasheet.ciiva.com/9194/aoa0000ce2-9194199.pdf, ComponentLink4URL=https://datasheet.ciiva.com/9194/aoa0000ce2-9194199.pdf, ComponentLink5Description=https://datasheet.ciiva.com/7830/aoa0000ce2-7830729.pdf, ComponentLink5URL=https://datasheet.ciiva.com/7830/aoa0000ce2-7830729.pdf, ComponentLink6Description=https://datasheet.ciiva.com/17212/aoa0000ce2-17212105.pdf, ComponentLink6URL=https://datasheet.ciiva.com/17212/aoa0000ce2-17212105.pdf, ComponentLink7Description=https://datasheet.ciiva.com/30208/aoa0000ce2-30208985.pdf, ComponentLink7URL=https://datasheet.ciiva.com/30208/aoa0000ce2-30208985.pdf, ComponentLink8Description=https://datasheet.ciiva.com/48530/aoa0000ce2-48530988.pdf, ComponentLink8URL=https://datasheet.ciiva.com/48530/aoa0000ce2-48530988.pdf, ComponentLink9Description=https://datasheet.ciiva.com/24070/aoa0000ce2-24070318.pdf, ComponentLink9URL=https://datasheet.ciiva.com/24070/aoa0000ce2-24070318.pdf, ComponentLink10Description=https://datasheet.ciiva.com/16759/70260748-16759807.pdf, ComponentLink10URL=https://datasheet.ciiva.com/16759/70260748-16759807.pdf, Composition="Thick Film", Contact Plating=Tin, Depth=0.8mm, Height=0.45mm, Lead Free="Lead Free", Length=1.6mm, Military Standard=Not, Mount="Surface Mount", Number of Pins=2, Number of Terminations=2, Packaging="Tape and Reel", Power Rating=100mW, Pricing 1="5000=0.00751, 10000=0.00653, 25000=0.00573, 50000=0.00526, 125000=0.00515 (USD)", Radiation Hardening=No, REACH SVHC="No SVHC", Stock 1=0, Supplier 1=Digi-Key, Termination=SMD/SMT, Voltage Rating (DC)=75V, Width=0.031inch
R6: Case/Package=0603, Case Code (Metric)=1608, Manufacturer=Vishay, Manufacturer Part Number=CRCW06036K80FKEA, Max Operating Temperature=155°C, Max Power Dissipation=100mW, Min Operating Temperature=-55°C, Package Quantity=10, Resistance=6.8k, Supplier Part Number 1=541-6.80KHTR-ND, Temperature Coefficient=100ppm/°C, Tolerance=1%, Voltage Rating=75V, Case Code (Imperial)=0603, ComponentLink1Description=https://datasheet.ciiva.com/11811/0900766b80d98afc-11811920.pdf, ComponentLink1URL=https://datasheet.ciiva.com/11811/0900766b80d98afc-11811920.pdf, ComponentLink2Description=https://datasheet.ciiva.com/2465/dcrcwe3-2465684.pdf, ComponentLink2URL=https://datasheet.ciiva.com/2465/dcrcwe3-2465684.pdf, ComponentLink3Description=https://datasheet.ciiva.com/2465/dcrcwe3-2465685.pdf, ComponentLink3URL=https://datasheet.ciiva.com/2465/dcrcwe3-2465685.pdf, ComponentLink4Description=https://datasheet.ciiva.com/2465/dcrcwe3-2465686.pdf, ComponentLink4URL=https://datasheet.ciiva.com/2465/dcrcwe3-2465686.pdf, ComponentLink5Description=https://datasheet.ciiva.com/26314/fld-crcw-e3-data-en-26314745.pdf, ComponentLink5URL=https://datasheet.ciiva.com/26314/fld-crcw-e3-data-en-26314745.pdf, ComponentLink6Description=https://datasheet.ciiva.com/16771/70201119-16771274.pdf, ComponentLink6URL=https://datasheet.ciiva.com/16771/70201119-16771274.pdf, ComponentLink7Description=https://datasheet.ciiva.com/22870/70201119-22870027.pdf, ComponentLink7URL=https://datasheet.ciiva.com/22870/70201119-22870027.pdf, ComponentLink8Description=https://datasheet.ciiva.com/3257/dcrcwe3-3257852.pdf, ComponentLink8URL=https://datasheet.ciiva.com/3257/dcrcwe3-3257852.pdf, ComponentLink9Description=https://datasheet.ciiva.com/7673/1697337-7673148.pdf, ComponentLink9URL=https://datasheet.ciiva.com/7673/1697337-7673148.pdf, ComponentLink10Description=https://datasheet.ciiva.com/3257/dcrcwe3-3257853.pdf, ComponentLink10URL=https://datasheet.ciiva.com/3257/dcrcwe3-3257853.pdf, ComponentLink11Description=https://datasheet.ciiva.com/16508/dcrcwe3-16508431.pdf, ComponentLink11URL=https://datasheet.ciiva.com/16508/dcrcwe3-16508431.pdf, Composition="Thick Film", Contact Plating=Tin, Depth=0.85mm, Height=0.45mm, Lead Free="Lead Free", Length=1.55mm, Military Standard=Not, Number of Terminations=2, Packaging="Tape and Reel", Power Rating=100mW, Pricing 1="5000=0.00497, 10000=0.00432, 25000=0.00405 (USD)", Radiation Hardening=No, REACH SVHC=Unknown, Stock 1=0, Supplier 1=Digi-Key, Termination=SMD/SMT, Voltage Rating (DC)=75V, Weight=7.1E-05oz, Width=0.033inch
R7: Case/Package=0603, Case Code (Metric)=1608, Manufacturer="Vishay Dale", Manufacturer Part Number=CRCW06031R00FKEA, Max Operating Temperature=155°C, Max Power Dissipation=100mW, Min Operating Temperature=-55°C, Package Quantity=10, Resistance=1, Supplier Part Number 1=541-1.00HHTR-ND, Temperature Coefficient=100ppm/°C, Tolerance=1%, Voltage Rating=75V, Case Code (Imperial)=0603, ComponentLink1Description=https://datasheet.ciiva.com/16396/aoa0000ce3-16396837.pdf, ComponentLink1URL=https://datasheet.ciiva.com/16396/aoa0000ce3-16396837.pdf, ComponentLink2Description=https://datasheet.ciiva.com/28691/391509-28691973.pdf, ComponentLink2URL=https://datasheet.ciiva.com/28691/391509-28691973.pdf, ComponentLink3Description=https://datasheet.ciiva.com/16784/70068852-16784839.pdf, ComponentLink3URL=https://datasheet.ciiva.com/16784/70068852-16784839.pdf, ComponentLink4Description=https://datasheet.ciiva.com/9117/aoa0000ce3-9117368.pdf, ComponentLink4URL=https://datasheet.ciiva.com/9117/aoa0000ce3-9117368.pdf, ComponentLink5Description=https://datasheet.ciiva.com/11810/0900766b80eefa12-11810728.pdf, ComponentLink5URL=https://datasheet.ciiva.com/11810/0900766b80eefa12-11810728.pdf, ComponentLink6Description=https://datasheet.ciiva.com/24165/aoa0000ce3-72189-24165336.pdf, ComponentLink6URL=https://datasheet.ciiva.com/24165/aoa0000ce3-72189-24165336.pdf, ComponentLink7Description=https://datasheet.ciiva.com/30060/6aoa0000ce3-30060648.pdf, ComponentLink7URL=https://datasheet.ciiva.com/30060/6aoa0000ce3-30060648.pdf, ComponentLink8Description=https://datasheet.ciiva.com/6138/391509-6138777.pdf, ComponentLink8URL=https://datasheet.ciiva.com/6138/391509-6138777.pdf, ComponentLink9Description=https://datasheet.ciiva.com/16766/70068852-16766778.pdf, ComponentLink9URL=https://datasheet.ciiva.com/16766/70068852-16766778.pdf, ComponentLink10Description=https://datasheet.ciiva.com/16853/aoa0000ce3-16853436.pdf, ComponentLink10URL=https://datasheet.ciiva.com/16853/aoa0000ce3-16853436.pdf, ComponentLink11Description=https://datasheet.ciiva.com/43455/391509-43455868.pdf, ComponentLink11URL=https://datasheet.ciiva.com/43455/391509-43455868.pdf, ComponentLink12Description=https://datasheet.ciiva.com/28547/391509-28547230.pdf, ComponentLink12URL=https://datasheet.ciiva.com/28547/391509-28547230.pdf, ComponentLink13Description=https://datasheet.ciiva.com/7792/1359337-7792119.pdf, ComponentLink13URL=https://datasheet.ciiva.com/7792/1359337-7792119.pdf, ComponentLink14Description=https://datasheet.ciiva.com/2465/dcrcwe3-2465528.pdf, ComponentLink14URL=https://datasheet.ciiva.com/2465/dcrcwe3-2465528.pdf, ComponentLink15Description=https://datasheet.ciiva.com/2465/dcrcwe3-2465529.pdf, ComponentLink15URL=https://datasheet.ciiva.com/2465/dcrcwe3-2465529.pdf, ComponentLink16Description=https://datasheet.ciiva.com/3257/dcrcwe3-3257225.pdf, ComponentLink16URL=https://datasheet.ciiva.com/3257/dcrcwe3-3257225.pdf, ComponentLink17Description=https://datasheet.ciiva.com/2465/dcrcwe3-2465530.pdf, ComponentLink17URL=https://datasheet.ciiva.com/2465/dcrcwe3-2465530.pdf, ComponentLink18Description=https://datasheet.ciiva.com/3257/dcrcwe3-3257226.pdf, ComponentLink18URL=https://datasheet.ciiva.com/3257/dcrcwe3-3257226.pdf, ComponentLink19Description=https://datasheet.ciiva.com/16883/dcrcwe3-16883290.pdf, ComponentLink19URL=https://datasheet.ciiva.com/16883/dcrcwe3-16883290.pdf, ComponentLink20Description=https://datasheet.ciiva.com/16768/70201119-16768957.pdf, ComponentLink20URL=https://datasheet.ciiva.com/16768/70201119-16768957.pdf, ComponentLink21Description=https://datasheet.ciiva.com/28621/1747939-28621389.pdf, ComponentLink21URL=https://datasheet.ciiva.com/28621/1747939-28621389.pdf, ComponentLink22Description=https://datasheet.ciiva.com/5541/dcrcwe3-109170-5541726.pdf, ComponentLink22URL=https://datasheet.ciiva.com/5541/dcrcwe3-109170-5541726.pdf, Composition="Thick Film", Contact Plating=Tin, Depth=0.85mm, Height=0.02inch, Lead Free="Lead Free", Length=1.55mm, Military Standard=Not, Mount="Surface Mount", Number of Pins=2, Number of Terminations=2, Packaging="Tape and Reel", Power Rating=100mW, Pricing 1="5000=0.00497, 10000=0.00432, 25000=0.00405 (USD)", Radiation Hardening=No, REACH SVHC=Unknown, Stock 1=0, Supplier 1=Digi-Key, Termination=SMD/SMT, Voltage Rating (DC)=75V, Weight=7.1E-05oz, Width=0.033inch